# Altium PCB Xds100v2Emu.PcbDoc
Units mil, origin at the board's own origin, x right, y up, seen from the top; angles counter-clockwise.
Board outline 1875 x 905 mil, 4 copper layers (Top Layer, GND, POWER, Bottom Layer), stack 62.967 mil thick; 46 components, 43 nets, 211 pads, 197 vias.
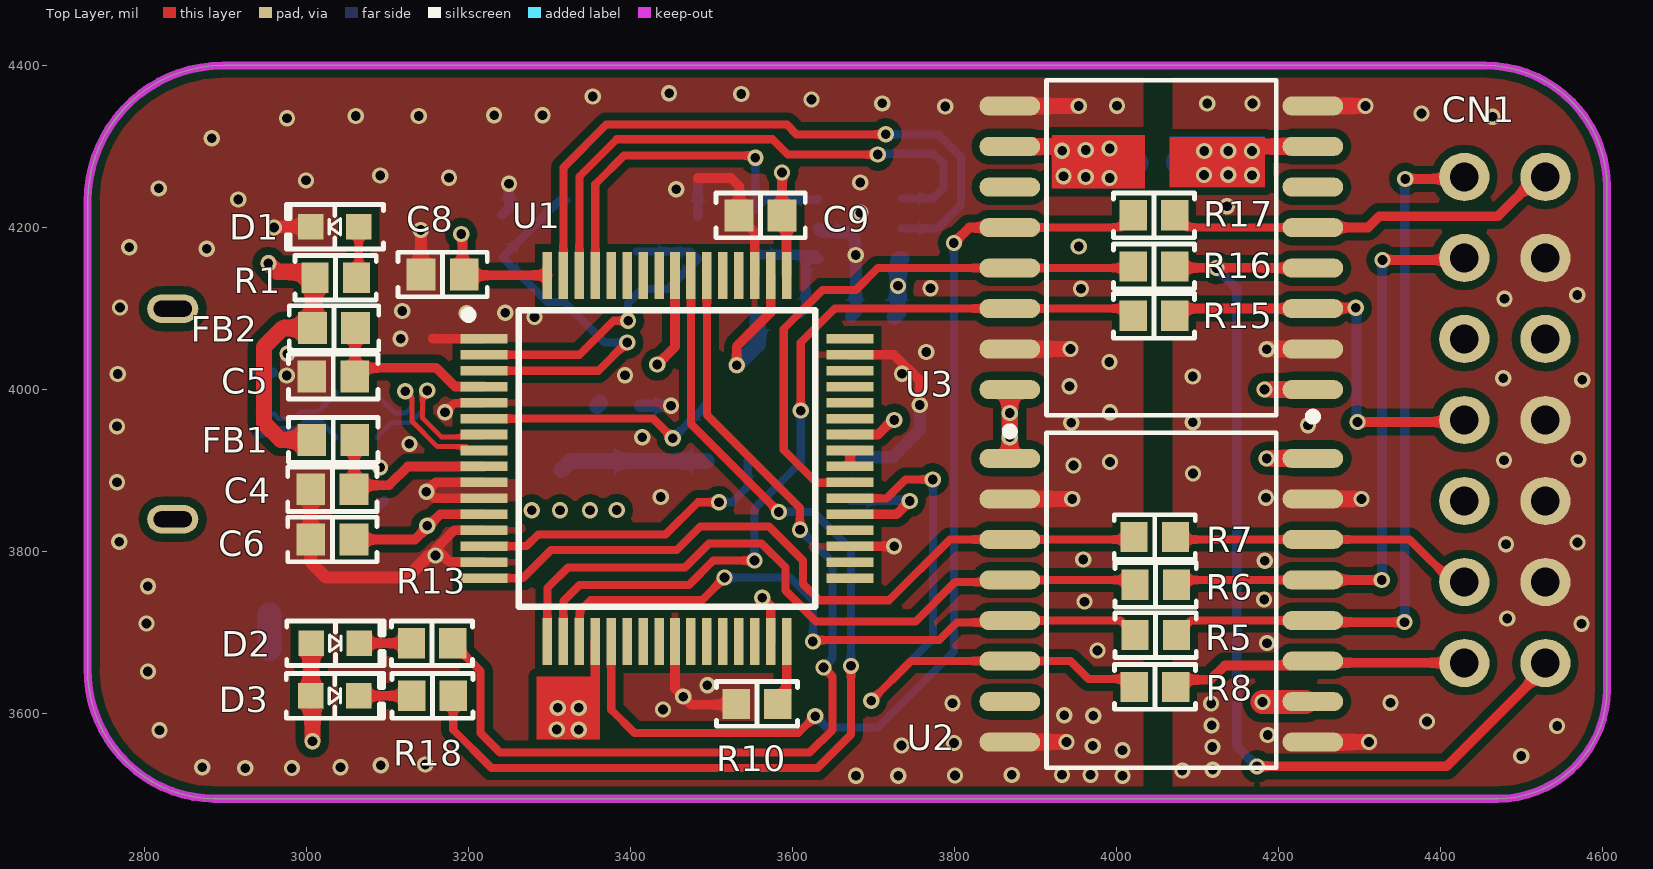
[diagram p0: Top Layer view]
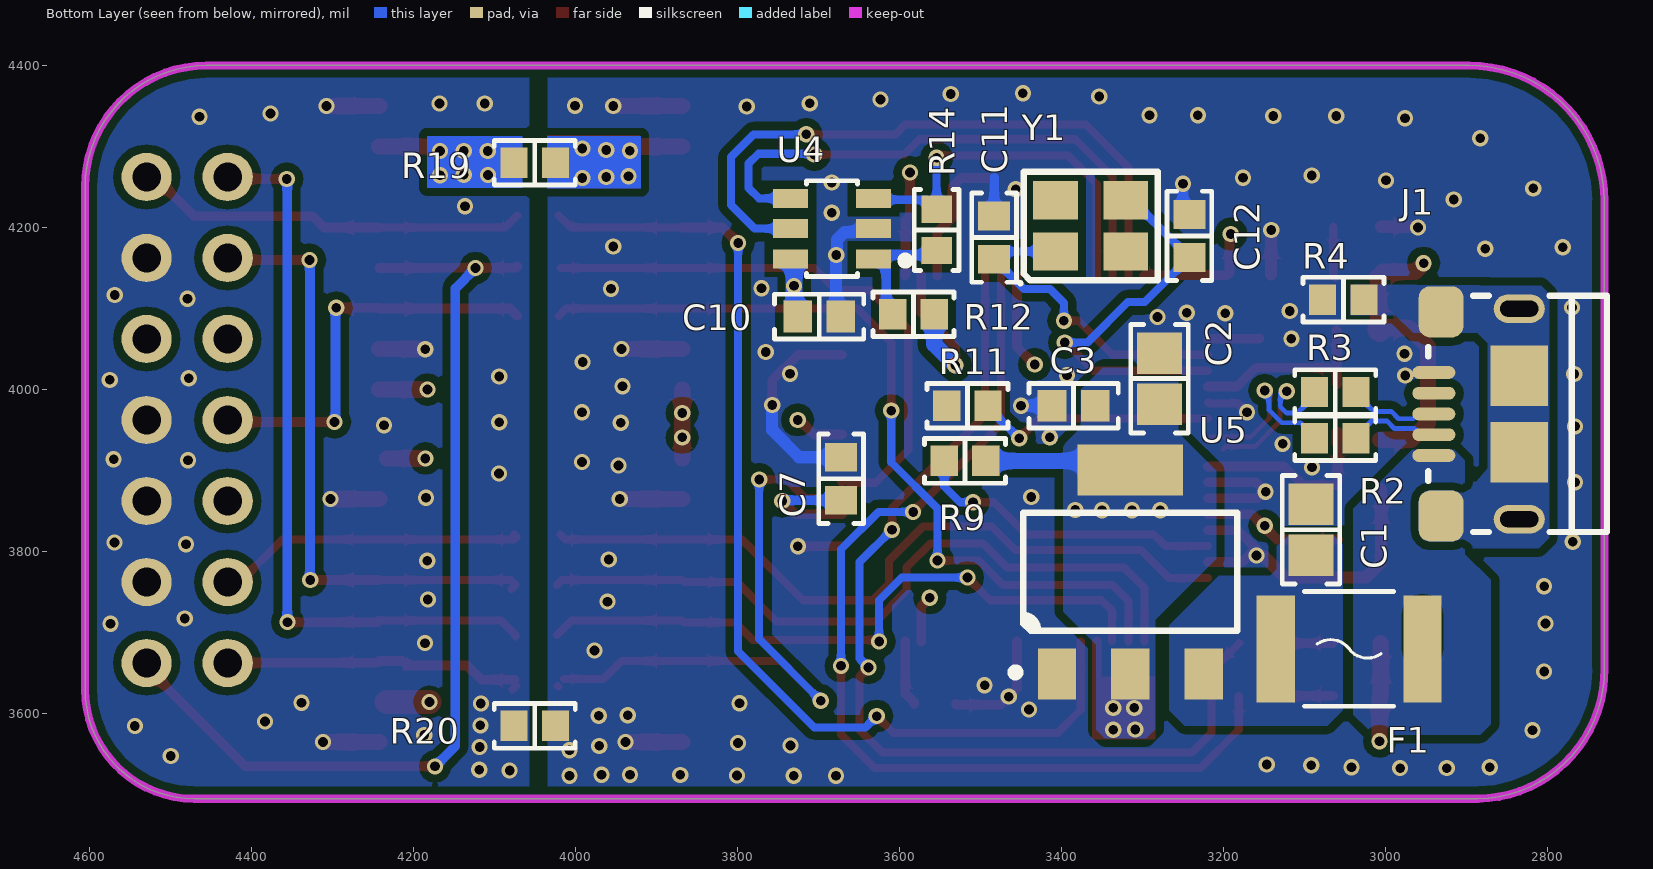
[diagram p1: Bottom Layer view, seen from below]
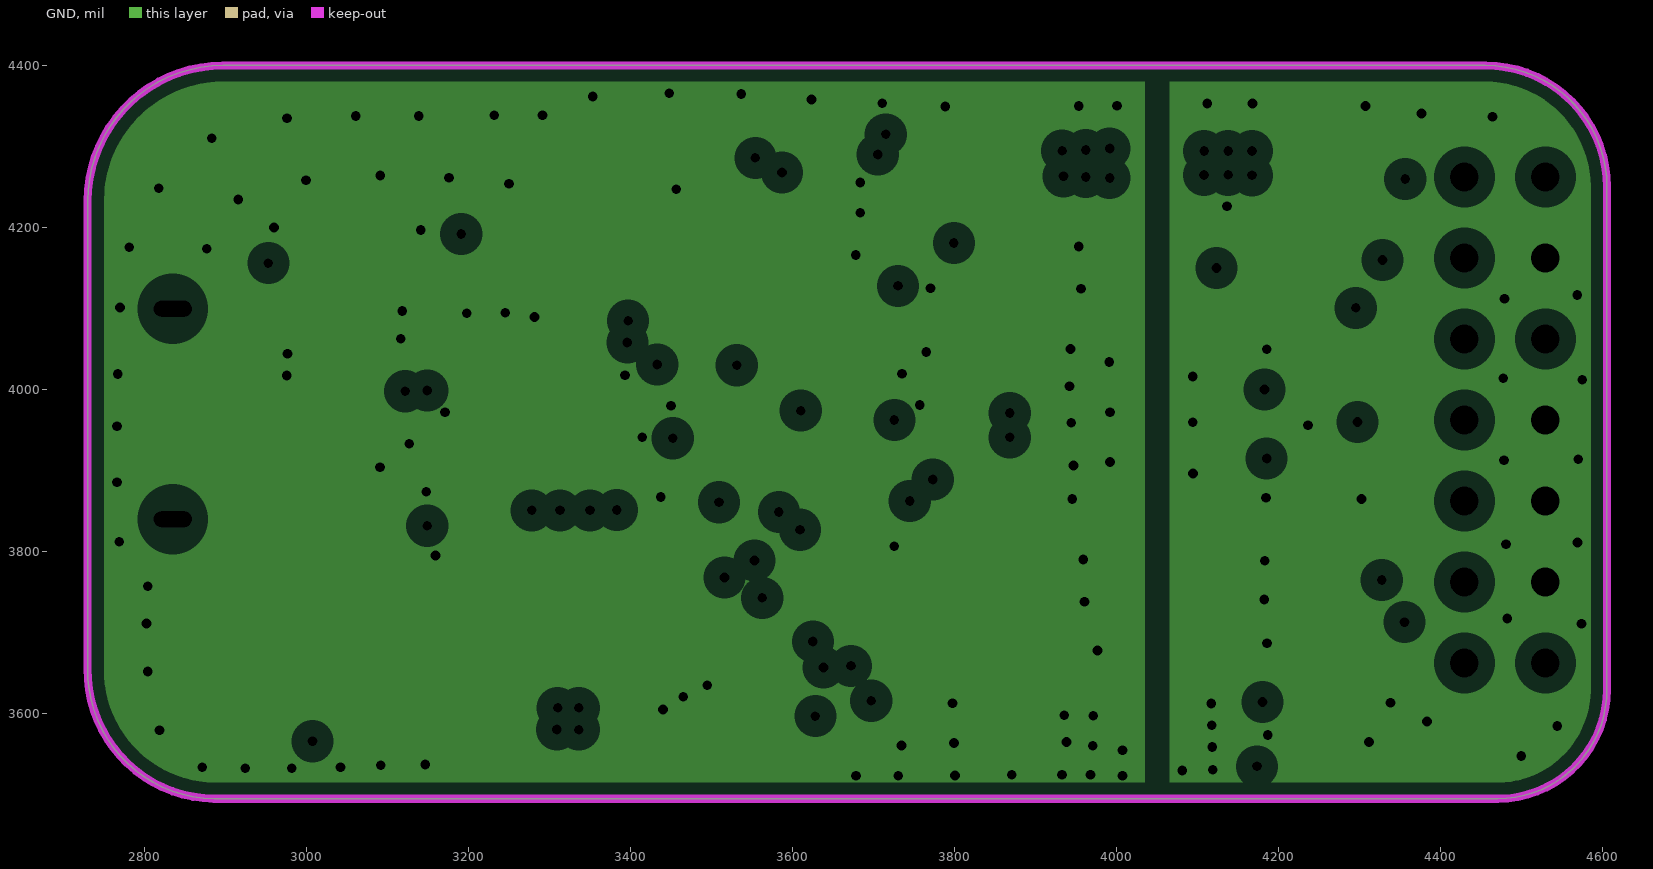
[diagram p2: GND, clearances drawn from the general rule]
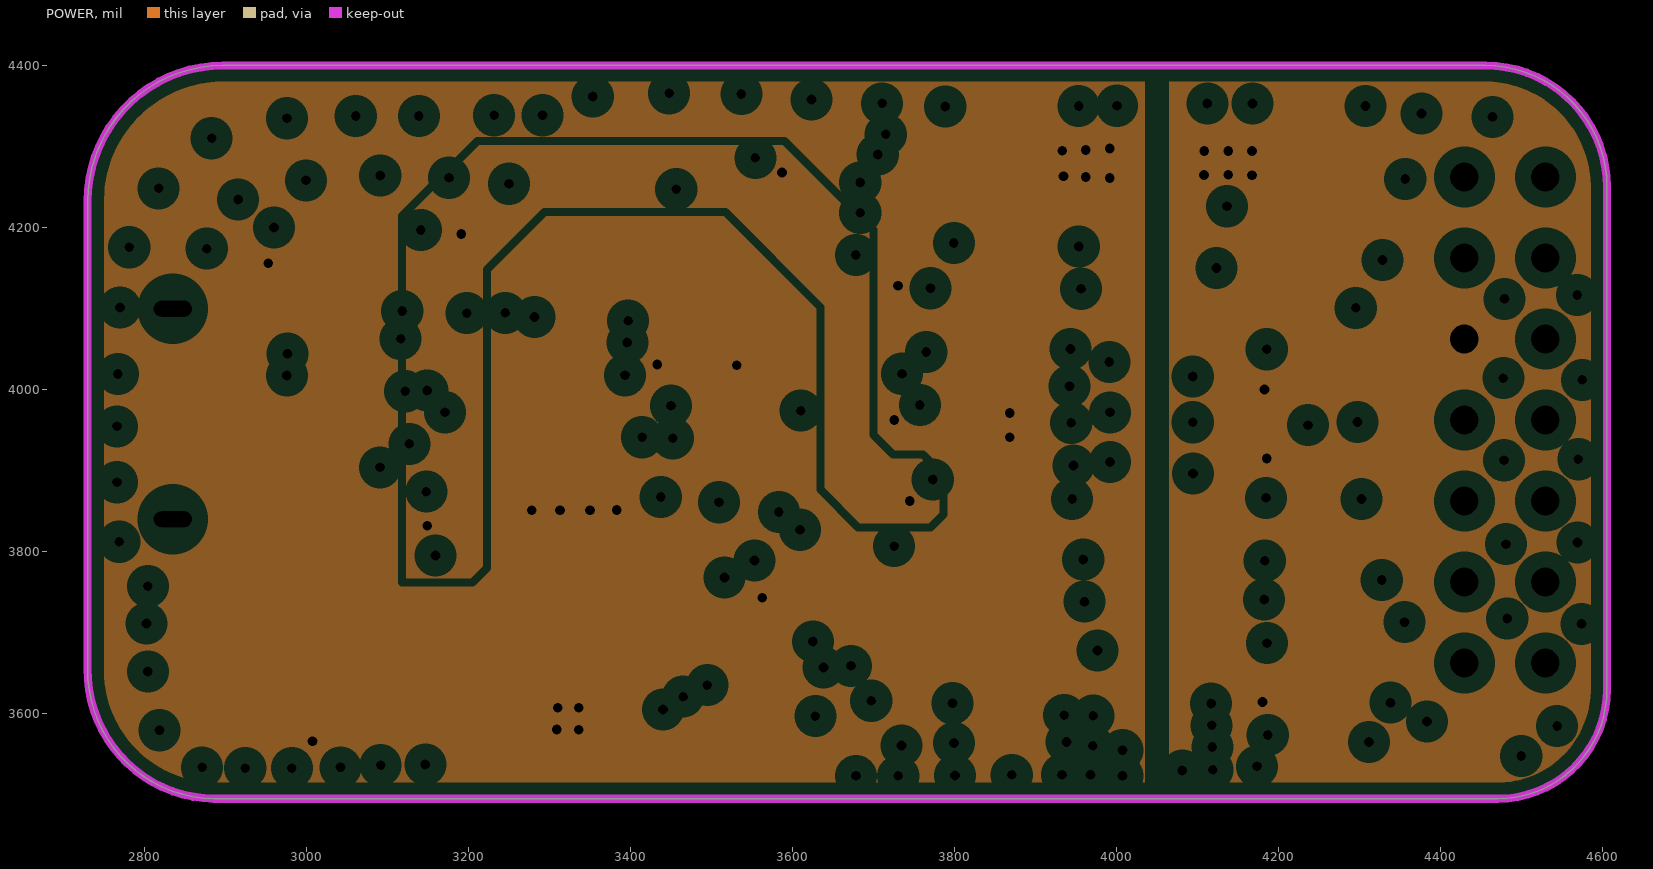
[diagram p3: POWER, clearances drawn from the general rule]
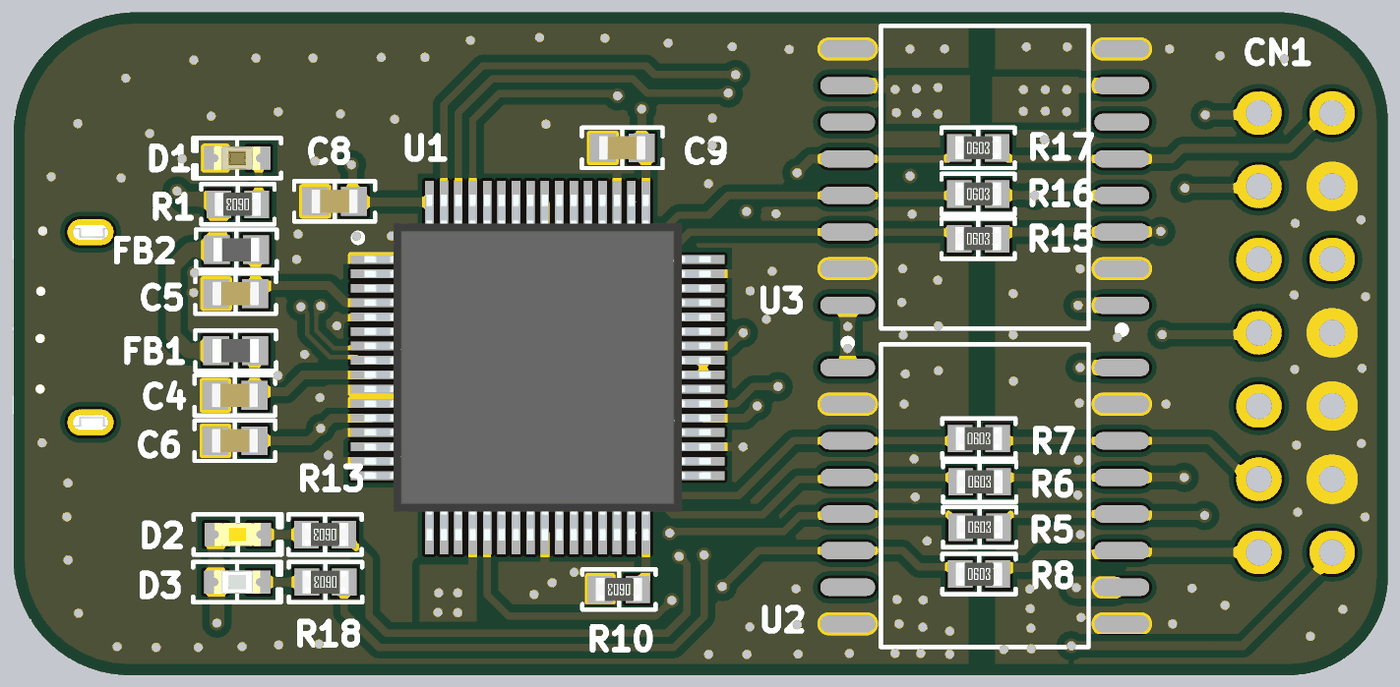
[diagram p4: 3D render of the assembled board from above, using the file's embedded part models]
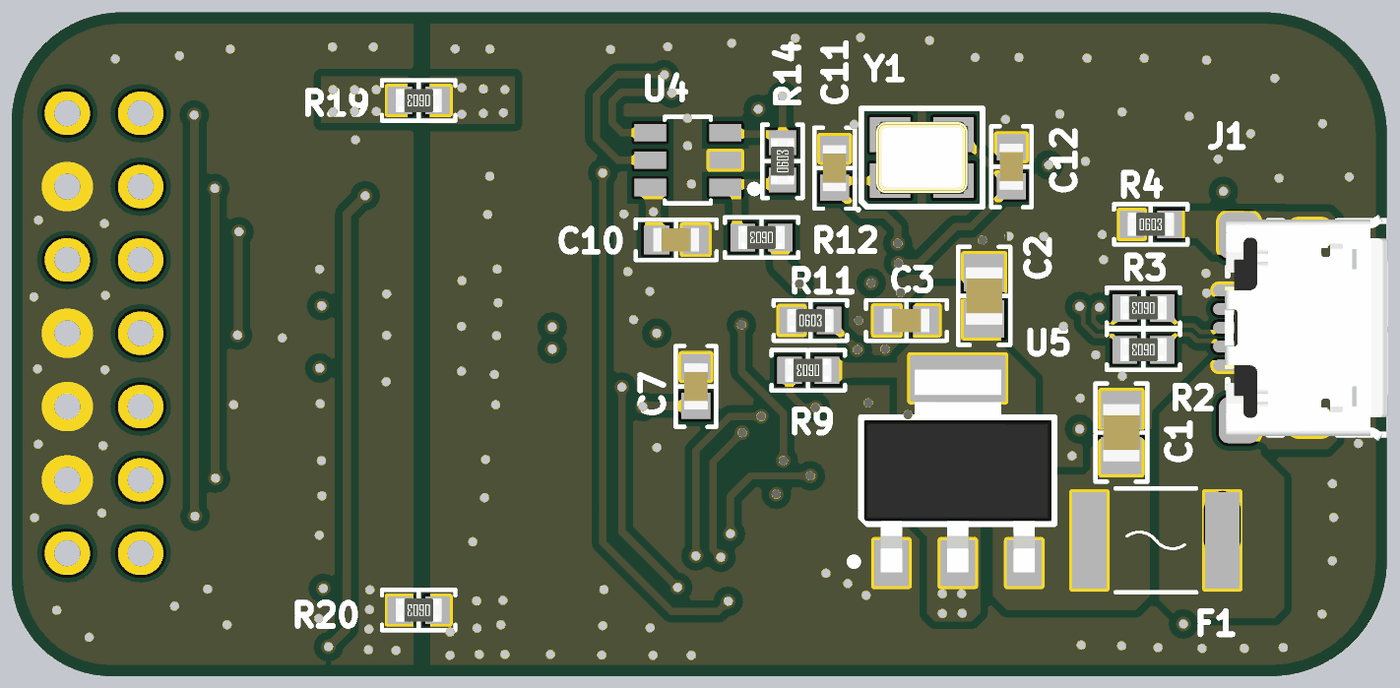
[diagram p5: 3D render of the assembled board from below, using the file's embedded part models]

## Layer stack, top to bottom
Top Solder: solder mask 0.4, Solder Resist, Dk 3.5
Top Layer: signal copper 1.4
Dielectric 2: prepreg 2.8, PP-006, Dk 4.1
GND: plane copper 1.3778, net AGND
Dielectric 1: dielectric 51.811, FR-4, Dk 4.8
POWER: plane copper 1.3778, net FTDI_3V3
Dielectric 3: prepreg 2.8, PP-006, Dk 4.1
Bottom Layer: signal copper 1.4
Bottom Solder: solder mask 0.4, Solder Resist, Dk 3.5

## Board outline
2730,3655.72 2730,4232.76 cw(c2897.24,4232.76) 2897.24,4400 4455,4400 cw(c4455,4250) 4605,4250 4605,3630 cw(c4470,3630) 4470,3495 2886,3495 cw(c2888.36,3653.36)

## Design rules (kind name [scope] priority, off if disabled: settings)
Clearance [All] p1: gap=6 ignorepadtopadclearanceinfootprint=TRUE except(10: Arc-Poly Track-Poly SMDPad-Poly THPad-Poly Via-Poly Fill-Poly Poly-Poly)
ComponentClearance [All] p1: gap=10 collisioncheckmode=3 verticalgap=100000 showdistances=FALSE
MinimumSolderMaskSliver [All] p1: minsoldermaskwidth=-1
PlaneClearance [All] p1: clearance=20
PlaneConnect [All] p1: planeconnectstyle=Direct reliefexpansion=20 reliefentries=4 reliefconductorwidth=10 reliefairgap=10
PolygonConnect [All] p1: connectstyle=Direct reliefconductorwidth=10 reliefentries=4 polygonreliefangle="90 Angle" airgapwidth=10
RoutingVias [All] p1: holewidth=12 width=20 viastyle="Through Hole" minholewidth=8 minwidth=16 maxholewidth=28 maxwidth=50
SilkToSilkClearance [All] p1: silktosilkclearance=-1
SilkToSolderMaskClearance [IsPad] p1: minsilkscreentomaskgap=-1 clearancetoexposedcopper=TRUE
SolderMaskExpansion [All] p1: expansion=4
Width [All] p1: maxlimit=50 minlimit=6 preferedwidth=10
24 further rules are at their usual default settings.

## Components (designator, comment, footprint, x,y, rotation, side; value= is the part's Value field where it differs from the comment)
C1 "#NAME?" "CAP 0805_2012" 3092,3827 r270 bottom value=10μF
C2 "#NAME?" "CAP 0805_2012" 3279,4013.5 r270 bottom value=10μF
C3 "0.1µF" "CAP 0603_1608" 3385,3980 r180 bottom value=0.1μF
C4 "4.7uF" "CAP 0603/1608" 3032,3877 r0 top
C5 "4.7uF" "CAP 0603/1608" 3033,4016 r180 top
C6 "100nF" "CAP 0603/1608" 3032,3815 r0 top
C7 "100nF" "CAP 0603/1608" 3672,3890 r270 bottom
C8 "100nF" "CAP 0603/1608" 3168,4142 r0 top
C9 "3.3uF" "CAP 0603/1608" 3560.43,4215 r0 top
C10 "100nF" "CAP 0603/1608" 3699,4090 r0 bottom
C11 "36pF" "CAP 0603/1608" 3483,4187.57 r270 bottom
C12 "36pF" "CAP 0603/1608" 3242,4189.57 r270 bottom
CN1 "JTAG" JTAG调试接口 4479,3811.46 r270 top
D1 "#NAME?" "LED 0603_1608 RED" 3035,4201 r180 top value=Red
D2 "#NAME?" "LED 0603_1608 YELLOW" 3035.71,3687 r0 top value=Yellow
D3 "#NAME?" "LED 0603_1608 GREEN" 3035,3622 r0 top value=Green
F1 "MF-MSMF050-2" FUSM4632X85N 3045,3680 r0 bottom value=500mA
FB1 "#NAME?" "FER 0603_1608" 3033,3938 r180 top value="470 Ohms @ 100MHz"
FB2 "#NAME?" "FER 0603_1608" 3034,4076 r180 top value="470 Ohms @ 100MHz"
J1 "USB Micro" "FCI USB 10118193-0001LF" 2836.97,3969.92 r270 bottom locked
R1 "680R" "RES 0603/1608" 3036,4138 r180 top
R2 "0R" "RES 0603/1608" 3062,3940 r0 bottom
R3 "0R" "RES 0603/1608" 3062,3997 r0 bottom
R4 "0R" "RES 0603/1608" 3052,4111 r180 bottom
R5 "NOT_INSTALLED" "RES 0603/1608" 4048,3697 r0 top
R6 "NOT_INSTALLED" "RES 0603/1608" 4048,3759 r0 top
R7 "NOT_INSTALLED" "RES 0603/1608" 4047,3818 r0 top
R8 "NOT_INSTALLED" "RES 0603/1608" 4047.2,3633 r0 top
R9 "1K" "RES 0603/1608" 3519,3912 r0 bottom
R10 "1K" "RES 0603/1608" 3556,3612 r180 top
R11 "12K" "RES 0603/1608" 3516,3980 r180 bottom
R12 "10K" "RES 0603/1608" 3582.59,4093 r0 bottom
R13 "680R" "RES 0603/1608" 3155,3687 r180 top
R14 "2K2" "RES 0603/1608" 3554,4197 r90 bottom
R15 "NOT_INSTALLED" "RES 0603/1608" 4046,4091 r0 top
R16 "NOT_INSTALLED" "RES 0603/1608" 4046,4152 r0 top
R17 "NOT_INSTALLED" "RES 0603/1608" 4046,4215 r0 top
R18 "680R" "RES 0603/1608" 3155.59,3622 r180 top
R19 "0 Ohms" "RES 0603_1608" 4050,4280 r0 bottom
R20 "0 Ohms" "RES 0603_1608" 4050,3585 r0 bottom
U1 "FT2232HQ-REEL" LQFP64_N 3445,3915 r0 top locked value=FT2232HL-REEL
U2 "ISO7240CDWR" SOIC127P1030X265-16N 4055,3740 r0 top locked
U3 "ISO7231CDWR" SOIC127P1030X265-16N 4055,4175 r180 top locked
U4 "93LC56BT-I/OT" SOT23-6 3683.18,4198.6 r0 bottom
U5 "AMS1117-3.3" "DIODES SOT-223" 3315,3775 r90 bottom
Y1 "#NAME?" "NDK NX3225SA" 3364,4202 r180 bottom value=12MHz

## Footprints (in the part's own frame and the unit in brackets; to place one, negate y for a bottom-side part, rotate by r counter-clockwise, add the part's x,y. Pads: shape width x height; smd on the part's side, far side on the other; paste and mask are expansions set on the pad)
"CAP 0603/1608" [mm] "Chip Capacitor, 2-Leads, Body 1.60x0.80mm, IPC Medium Density"
  rect 0.9x1 smd: 1(-0.675,0) 2(0.675,0)
  silkscreen extent -1.4,-0.7 1.4,0.7, body extent -0.8,-0.41 0.8,0.41, height 0.82
"CAP 0603_1608" [mm] "Chip Capacitor, 2-Leads, Body 1.60x0.80mm, IPC Medium Density"
  rect 0.9x1 smd: 1(-0.675,0) 2(0.675,0)
  silkscreen extent -1.4,-0.7 1.4,0.7, body extent -0.8,-0.41 0.8,0.41, height 0.82
"CAP 0805_2012" [mm] "Chip Capacitor, 2-Leads, Body 2.00x1.20mm, IPC Medium Density"
  rect 1.3x1.4 smd: 1(-0.8,0) 2(0.8,0)
  silkscreen extent -1.7,-0.9 1.7,0.9, body extent -1,-0.64 1,0.64, height 1.26
"DIODES SOT-223" [mm] "SOT223, 4-Leads, Body 6.50x7.00mm (avg), Pitch 2.30mm, IPC Medium Density"
  rect 1.6x1.2 smd: 1(-3.2,2.3) 2(-3.2,0) 3(-3.2,-2.3)
  rect 1.6x3.3 smd: 4(3.2,0)
  silkscreen extent -3.27,-3.35 1.85,3.73, body extent -3.52,-3.25 3.5,3.25, height 1.8
"FCI USB 10118193-0001LF" [mm] "USB 2.0 Type B Micro"
  oval 0.4x1.35 smd: 1(1.3,-2.625) 2(0.65,-2.625) 3(0,-2.625) 4(-0.65,-2.625) 5(-1.3,-2.625)
  oval 0.9x1.6 hole 0.5 slot 1.2 at 90 deg: S(-3.3,0.05) S(3.3,0.05)
  rrect50% 1.6x1.4 smd: S(-3.2,-2.4) S(3.2,-2.4)
  rect 1.9x1.8 smd: S(-1.2,0.05) S(1.2,0.05)
  silkscreen extent -3.7,-2.8 3.7,2.8, body extent -3.93,-2.9 3.93,2.76, height 2.78
"FER 0603_1608" [mm] "Chip Ferrite, 2-Leads, Body 1.60x0.80mm, IPC Medium Density"
  rect 0.9x1 smd: 1(-0.675,0) 2(0.675,0)
  silkscreen extent -1.4,-0.7 1.4,0.7, body extent -0.8,-0.41 0.8,0.41, height 0.82
FUSM4632X85N [mm]
  rect 1.2x3.35 smd paste+0 mask+0.1: 1(-2.3,0) 2(2.3,0)
  silkscreen extent -1.4,-1.8 1.4,1.8
JTAG调试接口 [mil]
  oval 59.06x62 hole 35.43: 1(-451,-50) 2(-451,50) 3(-351,-50) 4(-351,50) 5(-251,-50) 6(-251,50) 7(-151,-50) 8(-151,50) 9(-51,-50) 10(-51,50) 11(49,-50) 12(49,50) 13(149,-50) 14(149,50)
"LED 0603_1608 GREEN" [mm] "Chip Diode, 2-Leads, Body 1.60x0.80mm, IPC Medium Density"
  rect 0.8x0.8 smd: 1(-0.75,0) 2(0.75,0)
  silkscreen extent -1.52,-0.7 1.52,0.7, body extent -0.8,-0.4 0.8,0.4, height 0.53
"LED 0603_1608 RED" [mm] "Chip Diode, 2-Leads, Body 1.60x0.80mm, IPC Medium Density"
  rect 0.8x0.8 smd: 1(-0.75,0) 2(0.75,0)
  silkscreen extent -1.52,-0.7 1.52,0.7, body extent -0.8,-0.4 0.8,0.4, height 0.53
"LED 0603_1608 YELLOW" [mm] "Chip Diode, 2-Leads, Body 1.60x0.80mm, IPC Medium Density"
  rect 0.8x0.8 smd: 1(-0.75,0) 2(0.75,0)
  silkscreen extent -1.52,-0.7 1.52,0.7, body extent -0.8,-0.4 0.8,0.4, height 0.53
LQFP64_N [mm]
  rect 1.475x0.3 smd: 1(-5.738,3.75) 2(-5.738,3.25) 3(-5.738,2.75) 4(-5.738,2.25) 5(-5.738,1.75) 6(-5.738,1.25) 7(-5.738,0.75) 8(-5.738,0.25) 9(-5.738,-0.25) 10(-5.738,-0.75) 11(-5.738,-1.25) 12(-5.738,-1.75) 13(-5.738,-2.25) 14(-5.738,-2.75) 15(-5.738,-3.25) 16(-5.738,-3.75) 33(5.738,-3.75) 34(5.738,-3.25) 35(5.738,-2.75) 36(5.738,-2.25) 37(5.738,-1.75) 38(5.738,-1.25) 39(5.738,-0.75) 40(5.738,-0.25) 41(5.738,0.25) 42(5.738,0.75) 43(5.738,1.25) 44(5.738,1.75) 45(5.738,2.25) 46(5.738,2.75) 47(5.738,3.25) 48(5.738,3.75)
  rect 0.3x1.475 smd: 17(-3.75,-5.738) 18(-3.25,-5.738) 19(-2.75,-5.738) 20(-2.25,-5.738) 21(-1.75,-5.738) 22(-1.25,-5.738) 23(-0.75,-5.738) 24(-0.25,-5.738) 25(0.25,-5.738) 26(0.75,-5.738) 27(1.25,-5.738) 28(1.75,-5.738) 29(2.25,-5.738) 30(2.75,-5.738) 31(3.25,-5.738) 32(3.75,-5.738) 49(3.75,5.738) 50(3.25,5.738) 51(2.75,5.738) 52(2.25,5.738) 53(1.75,5.738) 54(1.25,5.738) 55(0.75,5.738) 56(0.25,5.738) 57(-0.25,5.738) 58(-0.75,5.738) 59(-1.25,5.738) 60(-1.75,5.738) 61(-2.25,5.738) 62(-2.75,5.738) 63(-3.25,5.738) 64(-3.75,5.738)
  silkscreen extent -6.35,-4.65 4.65,4.65, body extent -6,-6 6,6, height 1.6
"NDK NX3225SA" [mm] "Crystal, 4-Leads, Body 2.50x3.20mm, Pitch 2.20mm, IPC Medium Density"
  rect 1.4x1.2 smd: 1(-1.1,-0.8) 2(1.1,-0.8) 3(1.1,0.8) 4(-1.1,0.8)
  silkscreen extent -2.25,-1.85 2.1,1.7, body extent -1.61,-1.26 1.61,1.26, height 0.6
"RES 0603/1608" [mm] "Chip Resistor, 2-Leads, Body 1.60x0.80mm, IPC Medium Density"
  rect 0.85x0.95 smd: 1(-0.65,0) 2(0.65,0)
  silkscreen extent -1.27,-0.7 1.27,0.7, body extent -0.8,-0.4 0.8,0.4, height 0.45
"RES 0603_1608" [mm] "Chip Resistor, 2-Leads, Body 1.60x0.80mm, IPC Medium Density"
  rect 0.85x0.95 smd: 1(-0.65,0) 2(0.65,0)
  silkscreen extent -1.27,-0.7 1.27,0.7, body extent -0.8,-0.4 0.8,0.4, height 0.45
SOIC127P1030X265-16N [mm] "SOIC, 16-Leads, Body 10.30x7.50mm, Pitch 1.27mm, IPC Medium Density"
  oval 1.9x0.6 smd mask+0.1: 1(-4.75,4.445) 2(-4.75,3.175) 3(-4.75,1.905) 4(-4.75,0.635) 5(-4.75,-0.635) 6(-4.75,-1.905) 7(-4.75,-3.175) 8(-4.75,-4.445) 9(4.75,-4.445) 10(4.75,-3.175) 11(4.75,-1.905) 12(4.75,-0.635) 13(4.75,0.635) 14(4.75,1.905) 15(4.75,3.175) 16(4.75,4.445)
  silkscreen extent -4.87,-5.25 3.6,5.42
SOT23-6 [mm]
  rect 1.1x0.6 smd mask+0.1: 1(-1.3,0.95) 2(-1.3,0) 3(-1.3,-0.95) 4(1.3,-0.95) 5(1.3,0) 6(1.3,0.95)
  silkscreen extent -2.35,-1.5 0.8,1.5

## Part data
C1 C2: library part CL21B106KOQNNNG, "CAP CER 10UF 16V X7R 0805", Capacitance=10μF, Device Package="0805 (2012 Metric)", Manufacturer="Samsung Electro-Mechanics", Operating Temperature="-55°C ~ 125?", Supplier Part Number 1=1276-6472-1-ND, Temperature Coefficient=X7R, Tolerance=±10%, Voltage - Rated=16V, Applications="General Purpose", ComponentLink1Description=Datasheet, ComponentLink1URL=http://www.samsungsem.com/kr/support/product-search/mlcc/CL21B106KOQNNNG.jsp, ComponentLink2Description="DigiKey Link", ComponentLink2URL=http://digikey.com/product-detail/en/samsung-electro-mechanics/CL21B106KOQNNNG/1276-6472-1-ND/5958100, LastUpdated="2020/1/21 0:02:49", Lifecycle Status=Active, Minimum Order=1, Mounting Type="Surface Mount, MLCC", Package / Case="0805 (2012 Metric)", Packaging=TapeAndReel, PartId=13168, Part Number=CL21B106KOQNNNG, Part Status=Active, Price=0.06, Series=CL, Size / Dimension="0.079\" L x 0.049\" W (2.00mm x 1.25mm)", Supplier 1=DigiKey, Thickness (Max)="0.055\" (1.40mm)"
C3: library part GCJ188R71C104KA01D, "CAP CER 0.1UF 16V X7R 0603", Capacitance=0.1μF, Device Package="0603 (1608 Metric)", Manufacturer="Murata Electronics", Operating Temperature="-55°C ~ 125?", Ratings=AEC-Q200, Supplier Part Number 1=490-5796-1-ND, Temperature Coefficient=X7R, Tolerance=±10%, Voltage - Rated=16V, Applications="Automotive, Boardflex Sensitive", ComponentLink1Description=Datasheet, ComponentLink1URL=https://www.murata.com/~/media/webrenewal/support/library/catalog/products/capacitor/mlcc/c03e.ashx?la=en-us, ComponentLink2Description="DigiKey Link", ComponentLink2URL=http://digikey.com/product-detail/en/murata-electronics/GCJ188R71C104KA01D/490-5796-1-ND/2783830, Features="Soft Termination", LastUpdated="2020/1/21 0:01:37", Lifecycle Status=Active, Minimum Order=1, Mounting Type="Surface Mount, MLCC", Package / Case="0603 (1608 Metric)", Packaging=TapeAndReel, PartId=17928, Part Number=GCJ188R71C104KA01D, Part Status=Active, Price=0.05, Series=GCJ, Size / Dimension="0.063\" L x 0.031\" W (1.60mm x 0.80mm)", Supplier 1=DigiKey, Thickness (Max)="0.035\" (0.90mm)"
C4 C5: library part 1004001100218, "CAP,4.7UF,+/-20%,X5R,6.3V,SMD0603", Case/Package=0603, Case Code (Metric)=1608, Dielectric=X5R, Dielectric Material=Ceramic, Manufacturer=KEMET, Manufacturer Part Number=C0603C475M8PACTU, Max Operating Temperature=85°C, Min Operating Temperature=-55°C, Package Quantity=1, Supplier Part Number 1=399-9100-1-ND, Tolerance=20%, Voltage Rating=10V, Capacitance=4.7uF, Case Code (Imperial)=0603, ComponentLink1Description=https://datasheet.ciiva.com/28614/1918694-28614758.pdf?src-supplier=Element14, ComponentLink1URL=https://datasheet.ciiva.com/28614/1918694-28614758.pdf?src-supplier=Element14, Contact Plating=Tin,Matte, Depth=0.8mm, Dissipation Factor=5%, Height=0.8mm, Lead Free="Lead Free", Length=1.6mm, Mount="Surface Mount", Number of Pins=2, Packaging="Tape and Reel", Pricing 1="1 = 0.30000, 10 = 0.20900, 100 = 0.11830, 500 = 0.08350, 1000 = 0.07307 (USD)", REACH SVHC="No SVHC", ROHS=Yes, Stock 1=160821, Supplier 1=Digi-Key, Termination=SMD/SMT, Thickness=0.034inch, Voltage Rating (DC)=10V, Width=0.8mm
C6 C7 C8: library part 1004001100187, "CAP,100NF(0.1uf),+/-10%,X5R,16V,SMD0603"
C9: library part 1004001100252, "CAP,3.3uF,+/-10%,X5R,10V,SMD0603", Manufacturer=MURATA, Manufacturer Part Number=GRM188R61A335KE15D, Rating=10%, Embest PN=1004001100252, Part Type="Ceramic Capacitor"
C10: library part 1004001100187, "CAP,100NF(0.1uf),+/-10%,X5R,10V,SMD0603", Manufacturer=MURATA, Manufacturer Part Number=GRM155R61A104KA01D, Rating=10%, Embest PN=1004001100187, Part Type="Ceramic Capacitor"
C11 C12: library part 1004001100255, "CAP,36pF,+/-5%,C0G,50V,SMD0603", Manufacturer=MURATA, Manufacturer Part Number=GRM1555C1H360JA01D, Rating=5%, Embest PN=1004001100255, Part Type="Ceramic Capacitor"
CN1: library part "Header 7X2", "Header, 14-Pin", A规格=2.54
D1: library part SML-LXFM0603SIC-TR, "LED RED CLEAR 0603 SMD", Color=Red, Current - Test=20mA, Device Package="0603 (1608 Metric)", Lens Color=Colorless, Manufacturer="Lumex Opto/Components Inc.", Millicandela Rating=150mcd, Supplier Part Number 1=67-2194-1-ND, Voltage - Forward (Vf) (Typ)=2V, ComponentLink1Description=Datasheet, ComponentLink1URL=https://www.lumex.com/content/files/ProductAttachment/SML-LXFM0603SIC-TR.pdf, ComponentLink2Description="DigiKey Link", ComponentLink2URL=http://digikey.com/product-detail/en/lumex-opto-components-inc/SML-LXFM0603SIC-TR/67-2194-1-ND/4172841, Configuration=Standard, Height (Max)=1.10mm, LastUpdated="2020/1/21 3:13:21", Lens Size="1.10mm x 0.80mm", Lens Style="Rectangle with Flat Top", Lens Transparency=Clear, Lifecycle Status=Active, Minimum Order=1, Mounting Type="Surface Mount", Package / Case="0603 (1608 Metric)", Packaging=TapeAndReel, PartId=444, Part Number=SML-LXFM0603SIC-TR, Part Status=Active, Price=0.16, Series=-, Size / Dimension="1.60mm L x 0.80mm W", Supplier 1=DigiKey, Supplier Device Package="0603 (1608 Metric)", Viewing Angle=120°, Wavelength - Peak=636nm
D2: library part SML-D12Y8WT86, "LED YELLOW DIFFUSED 0603 SMD", Color=Yellow, Current - Test=20mA, Device Package="0603 (1608 Metric)", Lens Color=White, Manufacturer="Rohm Semiconductor", Millicandela Rating=63mcd, Supplier Part Number 1=511-1582-1-ND, Voltage - Forward (Vf) (Typ)=2.2V, ComponentLink1Description=Datasheet, ComponentLink1URL=https://www.rohm.com/datasheet/SML-D12V8W, ComponentLink2Description="DigiKey Link", ComponentLink2URL=http://digikey.com/product-detail/en/rohm-semiconductor/SML-D12Y8WT86/511-1582-1-ND/1641814, Configuration=Standard, Height (Max)=0.65mm, LastUpdated="2020/1/21 3:15:04", Lens Size="1.20mm x 0.80mm", Lens Style="Rectangle with Flat Top", Lens Transparency=Diffused, Lifecycle Status=Active, Minimum Order=1, Mounting Type="Surface Mount", Package / Case="0603 (1608 Metric)", Packaging=TapeAndReel, PartId=110, Part Number=SML-D12Y8WT86, Part Status=Active, Price=0.06, Series=EXCELED?, Size / Dimension="1.60mm L x 0.80mm W", Supplier 1=DigiKey, Supplier Device Package="0603 (1608 Metric)", Wavelength - Dominant=590nm
D3: library part SML-D13FWT86, "LED GREEN DIFFUSED 0603 SMD", Color=Green, Current - Test=20mA, Device Package="0603 (1608 Metric)", Lens Color=White, Manufacturer="Rohm Semiconductor", Millicandela Rating=22mcd, Supplier Part Number 1=SML-D13FWT86CT-ND, Voltage - Forward (Vf) (Typ)=2.1V, ComponentLink1Description=Datasheet, ComponentLink1URL=//media.digikey.com/pdf/Data%20Sheets/Rohm%20PDFs/SML-D13(A)%20Series.pdf, ComponentLink2Description="DigiKey Link", ComponentLink2URL=http://digikey.com/product-detail/en/rohm-semiconductor/SML-D13FWT86/SML-D13FWT86CT-ND/9952108, Configuration=Standard, Height (Max)=0.65mm, LastUpdated="2020/1/21 3:12:14", Lens Size="1.20mm x 0.80mm", Lens Style="Rectangle with Flat Top", Lens Transparency=Diffused, Lifecycle Status=Active, Minimum Order=1, Mounting Type="Surface Mount", Package / Case="0603 (1608 Metric)", Packaging=TapeAndReel, PartId=591, Part Number=SML-D13FWT86, Part Status=Active, Price=0.12, Series="SML-D13 (A)", Size / Dimension="1.60mm L x 0.80mm W", Supplier 1=DigiKey, Supplier Device Package="0603 (1608 Metric)", Wavelength - Dominant=564nm
F1: library part 1007001100029, "PTC RESETTABLE .50A 15V 1812", Manufacturer=BOURNS, Embest PN=1007001100029, Manufacturer Part Number=MF-MSMF050-2, Part Type=Polyswitch
FB1 FB2: library part BLM18BB471SN1D, "FERRITE BEAD 470 OHM 0603 1LN", Current Rating (Max)=300mA, DC Resistance (DCR) (Max)=850mOhm, Device Package="0603 (1608 Metric)", Impedance @ Frequency="470 Ohms @ 100MHz", Manufacturer="Murata Electronics", Operating Temperature="-55°C ~ 125?", Supplier Part Number 1=490-1021-1-ND, ComponentLink1Description=Datasheet, ComponentLink1URL=https://www.murata.com/en-us/products/productdata/8796738650142/ENFA0003.pdf, ComponentLink2Description="DigiKey Link", ComponentLink2URL=http://digikey.com/product-detail/en/murata-electronics/BLM18BB471SN1D/490-1021-1-ND/584469, Filter Type="Signal Line", Height (Max)="0.037\" (0.95mm)", LastUpdated="2020/1/21 2:28:20", Lifecycle Status=Active, Minimum Order=1, Mounting Type="Surface Mount", Number of Lines=1, Package / Case="0603 (1608 Metric)", Packaging=TapeAndReel, PartId=596, Part Number=BLM18BB471SN1D, Part Status=Active, Price=0.02, Series="EMIFIL?, BLM18", Size / Dimension="0.063\" L x 0.032\" W (1.60mm x 0.80mm)", Supplier 1=DigiKey
J1: library part "USB 2.0 Type B Micro"
R1 R13: library part 1003001100490, "RES,680R,+/-5%,1/10W,SMD0603"
R2 R3 R4: library part 1003001100001, "RES,0R,+/-5%,1/10W,SMD0603"
R5 R6 R7 R8 R15 R16 R17: library part 1003001100325, "RES,0R,+/-5%,1/10W,SMD0603"
R9: library part 1003001100034, "RES,1K,+/-5%,1/10W,SMD0603"
R10: library part 1003001100034, "RES,1K,+/-1%,1/10W,SMD0603"
R11: library part 1003001100075, "RES,12K,+/-1%,1/10W,SMD0603"
R12: library part 1003001100071, "RES,10K,+/-1%,1/10W,SMD0603"
R14: library part 1003001100045, "RES,2K2,+/-1%,1/10W,SMD0603"
R18: library part 1003001100490, "RES,680R,+/-1%,1/10W,SMD0603"
R19 R20: library part SFR03EZPJ000, "RES 0 OHM JUMPER 1/10W 0603", Device Package="0603 (1608 Metric)", Manufacturer="Rohm Semiconductor", Operating Temperature="-55°C ~ 155?", Power (Watts)="0.1W, 1/10W", Supplier Device Package=603, Supplier Part Number 1=511-1823-1-ND, Tolerance=Jumper, ComponentLink1Description=Datasheet, ComponentLink1URL=https://www.rohm.com/datasheet/SFR03EZPJ/sfr-e, ComponentLink2Description="DigiKey Link", ComponentLink2URL=http://digikey.com/product-detail/en/rohm-semiconductor/SFR03EZPJ000/511-1823-1-ND/9771887, Composition="Thick Film", Features=Anti-Sulfur, Height - Seated (Max)="0.022\" (0.55mm)", LastUpdated="2020/1/21 0:22:48", Lifecycle Status=Active, Minimum Order=1, Number of Terminations=2, Package / Case="0603 (1608 Metric)", Packaging=TapeAndReel, PartId=10194, Part Number=SFR03EZPJ000, Part Status=Active, Price=0.01, Resistance="0 Ohms", Series=SFR, Size / Dimension="0.063\" L x 0.031\" W (1.60mm x 0.80mm)", Supplier 1=DigiKey
U1: library part 1002010100084, "IC,Dual High Speed USB to Multipurpose UART/FIFO IC,FT2232HL-REEL,LQFP-64,SMD", Manufacturer=FTDI, Manufacturer Part Number=FT2232HL-REEL, Embest PN=1002010100084, Part Type=Interface
U2: library part 1002017100004C, "IC DGTL ISO 4CH CMOS 16SOIC,CUSTOMER SUPPLY", Manufacturer=TI, Embest PN=1002017100004C, Manufacturer Part Number=ISO7240CDWR, Part Type=Isolator
U3: library part 1002017100003C, "IC DGTL ISO 3CH CMOS 16SOIC,CUSTOMER SUPPLY", Manufacturer=TI, Embest PN=1002017100003C, Manufacturer Part Number=ISO7231CDWR, Part Type=Isolator
U4: library part 1002003100163, "IC,EEPROM Serial-Microwire 2K-Bit 128 x 16 2MHz,93LC56BT-I/OT,SOT-23-6,SMD", Manufacturer=MICROCHIP, Embest PN=1002003100163, Manufacturer Part Number=93LC56BT-I/OT, Part Type=Memory
U5: library part AMS1117, "电源转换5Vto3.3V"
Y1: library part NX3225SA-12MHZ-STD-CSR-6, "CRYSTAL 12.0000MHZ 8PF SMD", Device Package="4-SMD, No Lead", ESR (Equivalent Series Resistance)="100 Ohms", Frequency=12MHz, Frequency Stability=±25ppm, Frequency Tolerance=±15ppm, Load Capacitance=8pF, Manufacturer="NDK America, Inc.", Operating Mode=Fundamental, Operating Temperature="-40°C ~ 85?", Supplier Part Number 1=644-1180-1-ND, ComponentLink1Description=Datasheet, ComponentLink1URL=http://www.ndk.com/images/products/catalog/c_NX3225SA_e.pdf, ComponentLink2Description="DigiKey Link", ComponentLink2URL=http://digikey.com/product-detail/en/ndk-america-inc/NX3225SA-12MHZ-STD-CSR-6/644-1180-1-ND/3125569, Height - Seated (Max)="0.024\" (0.60mm)", LastUpdated="2020/1/21 3:23:16", Lifecycle Status=Active, Minimum Order=1, Mounting Type="Surface Mount", Package / Case="4-SMD, No Lead", Packaging=TapeAndReel, PartId=590, Part Number=NX3225SA-12MHZ-STD-CSR-6, Part Status=Active, Price=0.45, Series=NX3225SA, Size / Dimension="0.126\" L x 0.098\" W (3.20mm x 2.50mm)", Supplier 1=DigiKey, Type="MHz Crystal"

## Via types
v1: diameter 20, hole 12, Top Layer to Bottom Layer, tented both sides, 197 vias

## Nets (pads, with @x,y where several pads share a name; then routed paths per layer and width w, separated by ;. In a path a pad name is that pad's centre, name@x,y a point inside that pad or via, vN(x,y) a via of type N, cw(c..) or ccw(c..) an arc to the next point about the centre after c; other vN are vias at no path point)
+3V3: CN1.5 R19.2 U2.10 U2.16 U3.1 U3.7 | length 306.3
  Top Layer w20: v1(4107.9,4294.5) 4124.5,4294.5 4131,4301 4137.8,4294.2 v1(4137.5,4294.5) 4140.7,4294.5 4146.2,4300 U3.7 ; v1(4182.24,4000) U3.1 ; v1(4185,3915) U2.16@4232.01,3915
  Top Layer w30: v1(4180,3614.46) U2.10@4232.49,3614.46
  Bottom Layer w30: R19.2 4075.59,4281.97 R19.2@4077.32,4283.7
  other v1: 4166.8,4264.4 4107.7,4264.8 4137.5,4265.2 4166.9,4294.5
AGND: C1.1 C2.1 C3.1 C4.1 C5.2 C6.1 C7.1 C8.1 C9.1 C10.1 C11.1 C12.1 D1.2 J1.5 R4.1 R10.2 R11.1 R20.1 U1.1 U1.5 U1.10 U1.11 U1.13 U1.15 U1.25 U1.35 U1.47 U1.51 U2.2 U2.8 U3.9 U3.15 U4.2 U5.1 | length 2017.9
  Top Layer w10: v1(3171,3972) 3181.99,3982.99 3218.19,3982.99 U1.5
  Top Layer w12: 3156,4063 3156.36,4062.64 U1.1 ; U1.15 3219,3787.14 3177.02,3787.14 3161.16,3803 3159.2,3801.04 v1(3159.2,3795.2) 3159.2,3803.2 3182.32,3826.32 3219,3826.32 U1.13 ; U1.11 3158.38,3865.79 3150.16,3874 v1(3148,3874) 3159.47,3885.47 U1.10 ; U1.25 3454.84,3631.16 3475,3611 3529.41,3611 R10.2 ; 3483,4261 3524,4261 3534,4251 3534,4213.18 3533.85,4213.03 3553.27,4193.61 U1.51 ; U1.35 v1(3725.27,3806.73) v1@3726,3806 ; U1.47 3671,4042.86 3725.14,4042.86 3757,4011 v1(3757,3981)
  Top Layer w15: v1(2960,4200) 2961,4201 D1.2 ; C4.1 C6.1 3005.43,3786.57 3024,3768 3124,3768 3151.2,3795.2 v1(3159.2,3795.2) ; v1(3141,4197) 3141.43,4196.57 C8.1
  Top Layer w20: U2.8 v1(3938,3565) ; U2.2 v1(3945,3865) ; U3.15 v1(3943,4050) ; U3.9 v1(3953,4350)
  Bottom Layer w12: J1.5 J1.5@2959.02,4021.1 ; C1.1 C1.1@3096,3862.5 ; C12.1 3250,4224.15 v1(3250,4254) ; C11.1 3483,4261
  Bottom Layer w15: C3.1 v1(3450,3980) ; U4.2 3636.31,4194.29 3667.71,4194.29 3677.04,4184.96 3677.04,4166.96 v1(3678,4166) 3678,4095.57 C10.1 ; C7.1 3723.57,3916.57 3757,3950 v1(3757,3981)
  other v1: 3678.3,3523.3 3730.4,3523.3 4007.2,3523.4 3800.4,3523.7 3870.4,3524.5 3932.5,3524.6 3967.5,3524.6 2924.4,3532.8 2982,3532.8 2871.3,3533.8 3041.9,3533.8 3091.6,3536.3 3146.7,3537.3 4007.2,3554.9 3970.5,3560.3 3734.4,3560.8 3799.1,3563.8 2818.5,3579.5 3935.2,3598.2 3971,3597.5 3440.1,3605.1 3797.4,3612.9 3464.92,3621.08 3494.8,3635.2 2804.3,3652.1 3976.3,3678.1 2802.6,3711.3 3960.2,3738.3 2804.3,3757.3 3958.7,3790.2 2768.9,3812.2 3437.2,3867.4 2766.3,3885.6 3090.7,3904 3946.7,3906.3 3991.7,3910.6 3127,3933 3414.3,3941.1 2766.3,3954.6 3943.8,3959.1 3991.6,3971.9 3941.7,4004.1 2975.8,4017.3 3393,4017.7 2767.2,4019.2 3734.9,4019.6 3990.9,4034.1 2976.7,4044.3 3764.9,4046.5 3116.2,4062.8 3281.4,4089.5 3197.8,4094.3 3245.4,4094.7 3118.2,4097.1 2769.8,4101.4 3955.9,4124.4 3770.2,4125 2876.9,4173.9 2781.3,4175.7 3953.1,4176.6 3683.4,4218.16 2915.7,4234.7 3456.4,4247.3 2817.6,4248.3 3683.4,4255.6 2999.5,4258.2 3175.93,4261.4 3091.1,4264.2 2883,4310.2 2975.9,4334.93 3060.8,4337.6 3138.68,4337.6 3231.6,4338.5 3291.3,4338.5 3788.3,4349.4 4000.2,4350.3 3710.5,4353.2 3623.2,4358 3353.4,4361.8 3536.7,4364.8 3447.6,4365.7
D+: R3.2 U1.8 | length 206.5
  Top Layer w6: v1(3122,3998) 3130.4,3989.6 3130.4,3960.6 3161.38,3929.62 3197.35,3929.62 U1.8@3200.97,3926
  Bottom Layer w6: R3.2 3087.59,3992.41 3109,3971 3122,3971 3130,3979 v1@3130,3995.51 ; v1@3122,3993 v1(3122,3998)
D-: R2.2 U1.7 | length 217.5
  Top Layer w6: v1(3149,3999) 3143,3993 3143,3965 3166.38,3941.62 U1.7@3216.19,3941.62
  Bottom Layer w6: R2.2 3087.59,3941.97 3104.62,3959 3128,3959 3144,3975 3144,3994 v1(3149,3999)
FTDI_1V8: C6.2 C7.2 C8.2 C9.2 U1.12 U1.37 U1.49 U1.64 | length 611.4
  Top Layer w12: C6.2 3134,3815 3165.1,3846.1 U1.12 ; v1(3191,4192) 3192.53,4190.47 3192.53,4144.04 C8.2 3195.57,4141 3297.27,4141 U1.64 ; v1(3587,4268) C9.2 3592.54,4209.46 3592.54,4141 U1.49 ; U1.37 3728.1,3846.1 v1(3744.5,3862.5)
  Bottom Layer w12: C7.2 3744.5,3863.43 v1(3744.5,3862.5)
  other v1: 3149,3831.89
FTDI_3V3: C2.2 C3.2 C10.2 D2.1 D3.1 FB1.2 FB2.2 R1.2 R9.1 R12.1 R19.1 U1.20 U1.31 U1.42 U1.50 U1.56 U2.1 U3.10 U3.16 U4.6 U5.2 U5.4 | length 1389.7
  Top Layer w12: 3355,3639 3356.42,3640.42 U1.20 U1.20@3356.51,3689.19 ; v1(3433,4031) 3454.84,4052.84 U1.56 ; v1(3531,4030) 3531,4053 3572.86,4094.86 3572.86,4140.81 U1.50 ; v1(3562.47,3743) 3572.86,3732.62 3572.86,3689.19 U1.31 ; U1.42 3671,3944.62 3705.46,3944.62 3723.34,3962.5 v1(3725.5,3962.5)
  Top Layer w20: v1(2953,4156) 2963.68,4145.32 3003.68,4145.32 3010.41,4138.59 R1.2 ; D2.1 3005.83,3686.65 3005.83,3622.35 D3.1 3007.43,3620.05 v1(3007.43,3566) ; FB1.2 2968.3,3938 2947.5,3958.8 2947.5,4052.6 2970.9,4076 FB2.2 ; FB2.2@3008.92,4077.49 R1.2@3008.92,4138.51 ; U2.1 v1(3867.99,3941) v1(3867.99,3971) U3.16 ; U3.10 v1@3933,4300
  Top Layer w30: FB2.2@3007.43,4074 FB2.2
  Bottom Layer w20: U5.4 3326.02,3912 R9.1 ; C3.2 C3.2@3362.28,3983.86 ; v1(3531,4030) 3557,4056 R12.1 ; C10.2 3729.97,4094.39 v1(3729.97,4128) 3729.97,4159.39 3731.78,4161.2 U4.6
  Bottom Layer w30: R19.1@4023.37,4278.96 R19.1
  other v1: 3336,3580.3 3309,3580.6 3310,3607.2 3336,3607.2 3278,3850.96 3313,3850.96 3350,3850.96 3383,3851.32 3991.2,4261.1 3961.8,4262.3 3934.4,4263.2 3932.6,4294.8 3961.8,4295.6 3991.2,4297.4
FTDI_CLK: U1.62 U4.4 | length 693.1
  Top Layer w10: U1.62 3336.73,4262.73 3383,4309 3575,4309 3594,4290 v1(3705,4290)
  Bottom Layer w10: v1@3702,4291 3774,4291 3786,4279 3786,4249 3773,4236 U4.4
FTDI_CS: U1.63 U4.5 | length 800.4
  Top Layer w10: U1.63 3317.05,4274.05 3370,4327 3593,4327 3605,4315 v1(3715,4315)
  Bottom Layer w10: v1@3722,4315 3780,4315 3808,4287 3808,4228 3778.6,4198.6 U4.5
FTDI_DATA: R14.2 U1.61 U4.3 | length 473
  Top Layer w10: U1.61 3356.42,4253.42 3392,4289 3551,4289 v1(3554,4286)
  Bottom Layer w10: v1(3554,4286) R14.2 3565.73,4234.32 3630.32,4234.32 U4.3
GND: CN1.4 CN1.8 CN1.10 CN1.12 R20.2 U2.9 U2.15 U3.2 U3.8 | length 252.2
  Top Layer w20: v1(4185.1,4049.8) 4185.3,4050 U3.2 ; U2.9 v1(4311.3,3565) v1@4311.8,3564.5 ; U2.15 v1(4302.2,3865) ; U3.8 v1(4307,4350)
  other v1: 4081,3529.9 4118.4,3530.9 4499.2,3547.9 4118,3559 4186.3,3573.6 4543.5,3584.8 4117.1,3585.6 4382.8,3590.4 4116.5,3612.5 4337.8,3613.6 4185.4,3687.1 4573.7,3710.9 4481.9,3717.4 4181.9,3740.9 4182.6,3788.7 4480.4,3809.2 4568.7,3811.2 4184.2,3866.39 4094.2,3896.4 4477.8,3912.7 4569.7,3914 4236,3956.1 4093.8,3959.7 4574.5,4012 4477.1,4014.1 4093.8,4016.1 4478.5,4112 4568.4,4116.78 4136.2,4226.3 4463.7,4336.6 4376.1,4340.8 4111.8,4353 4167.5,4353
NetC4_2: C4.2 FB1.1 U1.9 | length 247.8
  Top Layer w12: FB1.1@3058.47,3938 FB1.1@3058.47,3947.97 ; FB1.1 3059.07,3937.5 3059.07,3884.47 3061.57,3881.97 3101.97,3881.97 3125.16,3905.16 U1.9 ; FB1.1@3060.57,3934.5 FB1.1@3060.57,3947.97
NetC5_1: C5.1 FB2.1 U1.4 | length 229.2
  Top Layer w12: C5.1@3059.57,4007 3060.07,4007.5 3060.07,4072.5 FB2.1@3060.57,4073 ; C5.1@3066,4027 3160.11,4027 3183.44,4003.68 3219,4003.68 U1.4
NetC11_2: C11.2 U1.2 Y1.1 | length 405.3
  Top Layer w10: U1.2 3336.95,4042.95 3379,4085 v1(3397,4085)
  Bottom Layer w10: v1(3397,4085) 3397,4107 3414.13,4124.13 3446.13,4124.13 C11.2 3473.5,4170.5 Y1.1
NetC12_2: C12.2 U1.3 Y1.3 | length 496.7
  Top Layer w10: U1.3 3360.27,4023.27 3395,4058 v1(3396,4058)
  Bottom Layer w10: Y1.3 3312.5,4233.5 C12.2 3297.11,4107.89 3318.11,4107.89 3368,4058 v1(3396,4058)
NetD1_1: D1.1 R1.1 | length 64.2
  Top Layer w10: R1.1 3064.53,4140.94 D1.1
NetD2_2: D2.2 R13.2 | length 64.2
  Top Layer w12: D2.2 R13.2
NetD3_2: D3.2 R18.2 | length 65.5
  Top Layer w12: D3.2 R18.2
NetF1_1: F1.1 J1.1 | length 42.3
  Bottom Layer w30: F1.1 F1.1@2954.45,3722.32
NetJ1_2: J1.2 R2.1 | length 113.7
  Bottom Layer w6: J1.2 2956.97,3944.33 2964.64,3952 2989,3952 2998,3961 3017.38,3961 3036.41,3941.97 R2.1
  Bottom Layer w10: J1.2 J1.2@2940.94,3943.7
NetJ1_3: J1.3 R3.1 | length 113.4
  Bottom Layer w6: J1.3 2960,3969.92 2965.92,3964 2984.03,3964 2993.03,3973 3014.38,3973 3036.41,3995.03 R3.1
NetJ1_S: J1.S R4.2
NetR5_1: R5.1 U1.19 U2.5 | length 819.7
  Top Layer w10: U1.19@3337.64,3690 3337.64,3727.25 3350.38,3740 3488,3740 v1(3516,3768) ; v1(3625,3689) 3627,3691 3781,3691 3802.59,3712.59 3865.58,3712.59 U2.5 4004.41,3715 R5.1
  Bottom Layer w10: v1(3516,3768) 3597,3768 3625,3740 v1(3625,3689)
NetR6_1: R6.1 U1.17 U2.4 | length 894.1
  Top Layer w10: U1.17 3297.36,3755.36 3322.63,3780.63 3467.39,3780.63 3496.76,3810 3561.7,3810 3591,3780.7 3591,3752 3629,3714 3752,3714 3800.39,3762.39 3865.39,3762.39 U2.4 4016.41,3765 R6.1
NetR7_1: R7.1 U1.16 U2.3 | length 913.9
  Top Layer w10: U1.16 3267.36,3767.36 3302,3802 3457,3802 3486,3831 3571,3831 3613,3789 3613,3760 3633,3740 3719,3740 3794,3815 U2.3 4012.41,3815 R7.1@4018.41,3821
NetR8_1: R8.1 U1.38 U2.6 | length 764
  Top Layer w10: U1.38 3715.91,3865.79 3739.12,3889 v1(3773,3889) ; v1(3697,3616) 3746,3665 U2.6 3943,3665 3965,3643 R8.1@4014.01,3643 ; R8.1@4020.61,3633.4 R8.1@4021.61,3634.4
  Bottom Layer w10: v1(3697,3616) 3773,3692 v1(3773,3889)
NetR9_2: R9.2 U1.14 | length 387.5
  Top Layer w10: U1.14 3271.73,3806.73 3286,3821 3443,3821 3483,3861 v1(3509,3861)
  Bottom Layer w10: v1(3509,3861) 3525,3861 3544.59,3880.59 R9.2
NetR10_1: R10.1 U1.32 | length 81.7
  Top Layer w12: R10.1 3581.59,3613.97 3592.64,3625.02 U1.32
NetR11_2: R11.2 U1.6 | length 297.7
  Top Layer w10: U1.6 3427.79,3964.21 v1@3451,3941
  Bottom Layer w10: v1(3452,3940) 3452.38,3940 3490.41,3978.03 R11.2
NetR12_2: R12.2 R14.1 U4.1 | length 166.1
  Bottom Layer w12: R14.1 3559.11,4166.3 3626.89,4166.3 U4.1 3622.16,4161.2 3616.35,4155.39 3616.35,4101.17 R12.2
NetR15_1: R15.1 U1.18 U3.14 | length 1030.7
  Top Layer w10: U1.18 3317.05,3739.05 3337.04,3759.04 3472.04,3759.04 3502,3789 v1(3553,3789) ; v1(3610,3974) 3610,4058 3652,4100 U3.14 4011.41,4100 R15.1
  Bottom Layer w10: v1(3553,3789) 3553,3853.37 3610,3910.37 v1(3610,3974)
NetR16_1: R16.1 U1.39 U3.13 | length 701.1
  Top Layer w10: U1.39@3662,3885 3629.37,3885 3589,3925.37 3589,4075 3637,4123 3678,4123 3705,4150 U3.13 R16.1@4018.41,4150 ; U1.39 U1.39@3671.81,3886.38
NetR17_1: R17.1 U1.21 U3.12 | length 1304
  Top Layer w10: U1.21 3376.1,3604.9 3405,3576 3607,3576 v1(3628,3597) ; U3.12 4005.41,4200 R17.1
  Top Layer w12: v1(3799,4181) 3818,4200 U3.12
  Bottom Layer w10: v1(3628,3597) 3642,3583 3705,3583 3799,3677 v1@3799,4173
NetU1_40: U1.40 U1.41 | length 19.7
  Top Layer w10: U1.40 U1.41
RxD_LED: R13.1 U1.54 | length 1214.9
  Top Layer w10: R13.1 3215,3652.59 3215,3576 3239,3552 3621,3552 3649,3580 3649,3646 v1(3638,3657) ; U1.54 3494.21,3968.79 3609,3854 v1(3609,3827)
  Bottom Layer w10: v1(3609,3827) 3649,3787 3649,3668 v1(3638,3657)
SCI_RX: CN1.13 R8.2 U2.11 | length 361.7
  Top Layer w10: R8.2@4072.79,3634.4 R8.2@4077.49,3629.7
  Top Layer w12: R8.2@4074.59,3642 4116,3642 4133.4,3659.4 4207.67,3659.4 4213.27,3665 U2.11 4244.23,3662.78 4415.22,3662.78 CN1.13@4418,3660
SCI_TX: CN1.14 R16.2 U3.4 | length 1211.9
  Top Layer w12: R16.2 4073.4,4150.19 4180,4150.19 4180.1,4150.1 4241.91,4150.1 U3.4 ; v1(4173,3535) 4407,3535 4518,3646 CN1.14@4518,3660
  Bottom Layer w12: v1(4123,4150) 4148,4125 4148,3560 v1(4173,3535)
TCK: CN1.11 R7.2 U2.14 | length 373.7
  Top Layer w10: R7.2@4075.59,3821 R7.2 4075.59,3815 U2.14 4361.53,3815 4416.53,3760 CN1.11@4418,3760
TDI: CN1.3 R6.2 U2.13 | length 748.4
  Top Layer w10: R6.2@4078.59,3754 R6.2 4079.59,3765 U2.13
  Top Layer w12: U2.13 v1(4327,3765) ; v1(4328,4160) CN1.3@4418,4160
  Bottom Layer w12: v1(4327,3765) 4327.5,3765.5 4327.5,4159.5 v1(4328,4160)
TDO: CN1.7 R15.2 U3.3 | length 490.2
  Top Layer w12: R15.2 4080.59,4100 U3.3 4242.88,4100.87 v1(4295,4100.87) ; v1(4297,3960) CN1.7@4418,3960
  Bottom Layer w12: v1(4295,4100.87) 4296,4099.87 4296,3961 v1(4297,3960)
TMS: CN1.1 R5.2 U2.12 | length 901.1
  Top Layer w10: R5.2@4073.59,3695.03 R5.2 4091.51,3714.92 U2.12@4241.92,3714.92
  Top Layer w12: U2.12@4241.92,3714.92 U2.12 4244.01,3713 v1(4355,3713) ; v1(4356,4260) CN1.1@4418,4260
  Bottom Layer w12: v1(4355,3713) 4355.5,3713.5 4355.5,4259.5 v1(4356,4260)
TRST: CN1.2 R17.2 U3.5 | length 477.5
  Top Layer w10: R17.2 4086.59,4200 U3.5
  Top Layer w12: U3.5 4310,4200 4324,4214 4470.53,4214 4516.53,4260 CN1.2@4518,4260
TxD_LED: R18.1 U1.55 | length 1243
  Top Layer w10: R18.1 3181.18,3580.13 3228.41,3532.9 3630.6,3532.9 3672,3574.3 v1(3672,3659) ; U1.55 3474.53,3957.47 v1(3583,3849)
  Bottom Layer w10: v1(3583,3849) 3625.94,3849 3672,3802.94 v1(3672,3659)
USBVCC: C1.2 F1.2 U5.3
pads on no net: CN1.6 CN1.9 J1.4 U1.22 U1.23 U1.24 U1.26 U1.27 U1.28 U1.29 U1.30 U1.33 U1.34 U1.36 U1.43 U1.44 U1.45 U1.46 U1.48 U1.52 U1.53 U1.57 U1.58 U1.59 U1.60 U2.7 U3.6 U3.11 Y1.2 Y1.4

## Polygon pours and split planes (outlines as drawn)
GND on Bottom Layer "Bottom_GMD" (solid, remove dead copper, pour order 16): 4057,4395 4057.01,4395.03 4443.02,4395.03 cw(c4443.02,4240.02) 4598.03,4240.02 4598.03,3620.01 cw(c4458.02,3620.01) 4458.02,3480 4057,3480
AGND on Bottom Layer "Button_AGND" (solid, remove dead copper, pour order 9): 4034.01,3489.99 2886,3489.99 cw(c2888.4,3653.4) 2724.99,3655.76 2724.99,4232.76 cw(c2897.24,4232.76) 2897.24,4405.01 4034,4405.01 4034,4395 4034.01,4394.98
no net on Bottom Layer "Bottom Layer-No Net" (solid, pour order 18): 4041,4248
NetJ1_S on Bottom Layer "NETJ1_S_L04_P007" (solid, remove dead copper, pour order 7): 2798,4118 2808,4128.08 3040,4130 3043,4130 3043,4092 2988,4092 2965.92,4069.92 2886.92,4069.92 2874,4057 2874,3903 2888,3886 2954,3886 2967,3873 2967,3817.08 2954,3804 2811,3804 2798,3817
NetF1_1 on Bottom Layer "Bottom Layer-NetF1_1" (solid, pour order 6): 2915,3926 2967,3926 2980,3913 3040,3853 3040,3732 3040,3599 3015,3574 2883,3574 2870,3587 2870,3765 2902,3797 2902,3913
FTDI_3V3 on Bottom Layer "Bottom Layer-FTDI_3V3" (solid, remove dead copper, pour order 2): 3272,4027 3256,4013 3256,3947 3209,3900 3209,3791 3284,3716 3284,3581 3295.59,3569.41 3346.41,3569.41 3357,3580 3357,3685 3398,3726 3398,3931 3376,3953 3376,4000 3349,4027
USBVCC on Bottom Layer "USBVCC_L04_P000" (solid, pour order 0): 3142,3770 3134,3778 3134,3806.52 3118,3821 3065,3821 3053,3809 3053,3604 3072,3585 3248,3585 3267,3604 3267,3709 3206,3770
GND on Top Layer "Top_GMD" (solid, remove dead copper, pour order 14): 4068.99,4404.98 4069,4405.02 4455,4405.02 cw(c4455,4250) 4610.02,4250 4610.02,3630 cw(c4470,3630) 4470,3489.99 4068.99,3489.99
AGND on Top Layer "Top_AGND" (solid, remove dead copper, pour order 11): 4033,3495 2884.98,3495 cw(c2887.38,3658.41) 2723.97,3660.77 2723.97,4237.78 cw(c2896.22,4237.78) 2896.22,4410.03 4032.99,4410.03 4032.99,4400.02 4033,4400
no net on Top Layer "Top Layer-No Net 1" (solid, pour order 12): 4126,4015
no net on Top Layer "Top Layer-No Net" (solid, pour order 4): 3284,3623
AGND on GND (split plane): 2897.24,4379.9 4034.93,4379.9 4034.93,3515.1 2886,3515.1 2885.86,3515.08 2878.49,3515.35 2868.67,3516.4 2858.95,3518.16 2849.38,3520.6 2840.01,3523.72 2830.88,3527.5 2822.05,3531.92 2813.55,3536.96 2805.44,3542.59 2797.75,3548.79 2790.52,3555.52 2783.79,3562.75 2777.59,3570.44 2771.96,3578.55 2766.92,3587.05 2762.5,3595.88 2758.72,3605.01 2755.6,3614.38 2753.16,3623.95 2751.4,3633.67 2750.35,3643.49 2749.99,3653.36 2750.07,3655.42 2750.1,3655.72 2750.1,4232.76 2750.03,4233.44 2750.38,4243.26 2751.5,4253.71 2753.37,4264.06 2755.97,4274.24 2759.29,4284.21 2763.31,4293.92 2768.02,4303.32 2773.38,4312.36 2779.37,4320.99 2785.97,4329.18 2793.13,4336.87 2800.82,4344.03 2809.01,4350.63 2817.64,4356.62 2826.68,4361.98 2836.08,4366.69 2845.79,4370.71 2855.76,4374.03 2865.94,4376.63 2876.29,4378.5 2886.74,4379.62 2896.56,4379.97
GND on GND (split plane): 4464.27,4379.65 4473.5,4378.66 4482.63,4377.01 4491.62,4374.72 4500.42,4371.79 4509,4368.24 4517.29,4364.08 4525.27,4359.35 4532.9,4354.06 4540.12,4348.23 4546.91,4341.91 4553.23,4335.12 4559.06,4327.9 4564.35,4320.27 4569.08,4312.29 4573.24,4304 4576.79,4295.42 4579.72,4286.62 4582.01,4277.63 4583.66,4268.5 4584.65,4259.27 4584.96,4250.59 4584.9,4250 4584.9,3630 4584.96,3629.38 4584.63,3620.98 4583.57,3612.01 4581.81,3603.16 4579.36,3594.47 4576.24,3586 4572.46,3577.8 4568.04,3569.92 4563.03,3562.41 4557.44,3555.32 4551.31,3548.69 4544.68,3542.56 4537.59,3536.97 4530.08,3531.96 4522.2,3527.54 4514,3523.76 4505.53,3520.64 4496.84,3518.19 4487.99,3516.43 4479.02,3515.37 4470.62,3515.04 4470,3515.1 4065.07,3515.1 4065.07,4379.9 4455,4379.9 4455.59,4379.96
FTDI_3V3 on POWER (split plane): 2897.24,4379.9 4034.63,4379.9 4034.63,3515.1 2886,3515.1 2885.86,3515.08 2878.49,3515.35 2868.67,3516.4 2858.95,3518.16 2849.38,3520.6 2840.01,3523.72 2830.88,3527.5 2822.05,3531.92 2813.55,3536.96 2805.44,3542.59 2797.75,3548.79 2790.52,3555.52 2783.79,3562.75 2777.59,3570.44 2771.96,3578.55 2766.92,3587.05 2762.5,3595.88 2758.72,3605.01 2755.6,3614.38 2753.16,3623.95 2751.4,3633.67 2750.35,3643.49 2749.99,3653.36 2750.07,3655.42 2750.1,3655.72 2750.1,4232.76 2750.03,4233.44 2750.38,4243.26 2751.5,4253.71 2753.37,4264.06 2755.97,4274.24 2759.29,4284.21 2763.31,4293.92 2768.02,4303.32 2773.38,4312.36 2779.37,4320.99 2785.97,4329.18 2793.13,4336.87 2800.82,4344.03 2809.01,4350.63 2817.64,4356.62 2826.68,4361.98 2836.08,4366.69 2845.79,4370.71 2855.76,4374.03 2865.94,4376.63 2876.29,4378.5 2886.74,4379.62 2896.56,4379.97
+3V3 on POWER (split plane): 4464.27,4379.65 4473.5,4378.66 4482.63,4377.01 4491.62,4374.72 4500.42,4371.79 4509,4368.24 4517.29,4364.08 4525.27,4359.35 4532.9,4354.06 4540.12,4348.23 4546.91,4341.91 4553.23,4335.12 4559.06,4327.9 4564.35,4320.27 4569.08,4312.29 4573.24,4304 4576.79,4295.42 4579.72,4286.62 4582.01,4277.63 4583.66,4268.5 4584.65,4259.27 4584.96,4250.59 4584.9,4250 4584.9,3630 4584.96,3629.38 4584.63,3620.98 4583.57,3612.01 4581.81,3603.16 4579.36,3594.47 4576.24,3586 4572.46,3577.8 4568.04,3569.92 4563.03,3562.41 4557.44,3555.32 4551.31,3548.69 4544.68,3542.56 4537.59,3536.97 4530.08,3531.96 4522.2,3527.54 4514,3523.76 4505.53,3520.64 4496.84,3518.19 4487.99,3516.43 4479.02,3515.37 4470.62,3515.04 4470,3515.1 4064.77,3515.1 4064.77,4379.9 4455,4379.9 4455.59,4379.96
FTDI_1V8 on POWER (split plane): 3694.9,4194.89 3694.9,3944 3695.29,3942.05 3696.4,3940.4 3720.4,3916.4 3722.05,3915.29 3724,3914.9 3758.89,3914.9 3780.9,3892.89 3780.9,3848.11 3767.89,3835.1 3683,3835.1 3639.5,3878.6 3639.5,4101.6 3639.11,4103.55 3638,4105.2 3520.6,4222.6 3518.95,4223.71 3517,4224.1 3294,4224.1 3292.05,4223.71 3290.4,4222.6 3219.4,4151.6 3218.29,4149.95 3217.9,4148 3217.9,3782.11 3202.89,3767.1 3123.1,3767.1 3123.1,4211.89 3213.11,4301.9 3587.89,4301.9

## Keep-outs
Keep-Out Layer:
  the board outline again, w10

## Other copper
Top Layer:
  rectangle net +3V3: 4065,4250 4183,4312
  rectangle net FTDI_3V3: 3920,4248 4035,4314
  rectangle net FTDI_3V3: 3284,3568 3362,3646
Bottom Layer:
  rectangle net +3V3: 4065,4249 4183,4313
  rectangle net FTDI_3V3: 3919,4248 4035,4313
GND (plane layer: these items are gaps in the copper):
  lines w30: 4050,3498 4050,4403
POWER (plane layer: these items are gaps in the copper):
  lines w10: 3118,3762 3118,4214 3211,4307 3590,4307 3700,4197 3700,3944 3724,3920 3761,3920 3786,3895 3786,3846 3770,3830 3680.89,3830 3634.4,3876.49 3634.4,4101.6 3517,4219 3294,4219 3223,4148 3223,3780 3205,3762 3118,3762
  lines w30: 4049.7,3484.4 4049.7,4389.4

## Silkscreen, mask and mechanical layers (free items; w line width, h text height)
Mechanical 1:
  lines w10: 2730,3655.72 ccw(c2888.36,3653.36) 2886,3495 4470,3495 ccw(c4470,3630) 4605,3630 4605,4250 ccw(c4455,4250) 4455,4400 2897.24,4400 ccw(c2897.24,4232.76) 2730,4232.76 2730,4151.22 2730,3655.72